# Altium PCB TX_LPF_Add_on.PcbDoc (part 2 of 2)
Units mm, origin at the board's own origin, x right, y up, seen from the top; angles counter-clockwise.
Board outline 187.14 x 77.23 mm, 2 copper layers (Top Layer, Top, Bottom Layer, Bottom); 102 components, 53 nets, 283 pads, 1391 vias.
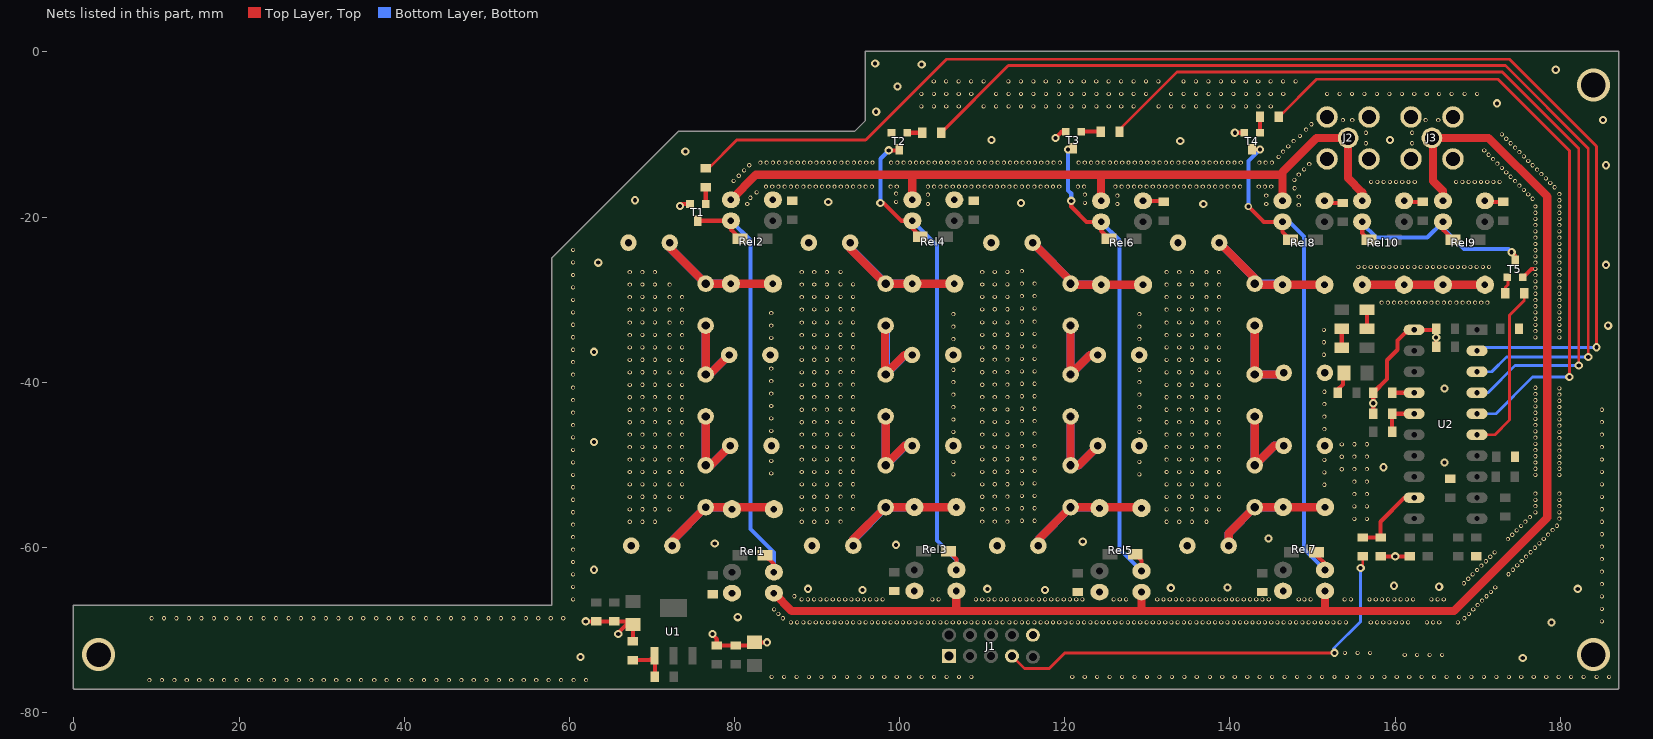
[diagram p2: the nets of this part, all layers, seen from the top]

## Via types
v1: diameter 0.5, hole 0.3, Top Layer, Top to Bottom Layer, Bottom, tented both sides, 1313 vias
v2: diameter 1, hole 0.5, Top Layer, Top to Bottom Layer, Bottom, 73 vias
v3: diameter 4, hole 3, Top Layer, Top to Bottom Layer, Bottom, 3 vias
v4: diameter 0.9, hole 0.5, Top Layer, Top to Bottom Layer, Bottom, 1 vias
v5: diameter 1.27, hole 0.711, Top Layer, Top to Bottom Layer, Bottom, 1 vias

## Nets (pads, with @x,y where several pads share a name; then routed paths per layer and width w, separated by ;. In a path a pad name is that pad's centre, name@x,y a point inside that pad or via, vN(x,y) a via of type N, cw(c..) or ccw(c..) an arc to the next point about the centre after c; other vN are vias at no path point) (continued)
GND: C1.2 C2.1 C3.1 C4.1 C5.1 C6.1 C7.2 C8.1 C9.1 C10.1 C11.1 C12.1 C13.2 C14.1 C15.1 C16.1 C17.1 C18.1 C19.1 C20.1 C21.1 C22.1 C23.1 C24.1 C25.2 C26.1 C27.1 C28.1 C29.1 C30.1 C31.1 C32.1 C33.1 C34.2 C35.1 C36.2 C37.1 J1.1 J1.10 J2.1 J2.2 J2.3 J2.4 J3.1 J3.2 J3.3 J3.4 R5.1 R6.1 R9.1 R10.1 R13.1 R15.2 R17.1 R20.2 Rel1.2 Rel2.2 Rel3.2 Rel4.2 Rel5.2 Rel6.2 Rel7.2 Rel8.2 Rel9.2 Rel10.2 T1.2 T2.2 T3.2 T4.2 T5.2 U2.20 | length 57.2
  Top Layer, Top w0.5: v2(61.976,-68.961) C22.1@63.246,-68.961 C23.1@65.405,-68.961 67.307,-68.961 C24.1@67.691,-69.345 ; v2(65.913,-70.485) 65.786,-70.485 66.926,-69.345 C24.1@67.691,-69.345 ; R15.2@67.691,-71.374 C24.1@67.691,-69.345 ; v2(73.406,-18.669) 73.66,-18.415 T1.2@74.609,-18.415 ; v2(77.343,-70.485) 77.343,-70.612 77.851,-71.12 C20.1@77.851,-71.882 C21.1@80.137,-71.882 82.042,-71.882 C19.1@82.423,-71.501 v2(83.947,-71.501) ; v2(118.872,-10.414) 119.634,-9.652 T3.2@120.091,-9.652 ; Rel6.2@129.473,-18.034 131.826,-18.034 C14.1@131.953,-18.161 ; v2(140.589,-9.779) T4.2@141.732,-9.779 ; Rel8.2@151.444,-18.034 151.698,-18.288 C26.1@153.67,-18.288 ; R20.2@153.035,-41.275 153.035,-40.894 153.67,-40.259 153.67,-38.986 C33.1@153.794,-38.862 ; C37.1@157.353,-43.815 v2(157.353,-42.545) R17.1@157.353,-41.275 159.004,-39.624 159.004,-37.338 160.274,-36.068 160.274,-34.925 161.544,-33.655 U2.20@162.306,-33.655 164.846,-33.655 C34.2@164.973,-33.528 v2(164.973,-34.568) C31.1@164.973,-35.687 ; R13.1@158.242,-61.087 v2(160.02,-61.087) R10.1@161.798,-61.087 ; Rel10.2@161.096,-18.034 161.223,-18.161 C36.2@163.322,-18.161 ; Rel9.2@170.875,-18.034 171.002,-18.161 C35.1@173.101,-18.161 ; T5.2@175.465,-27.305 176.496,-26.274 176.726,-26.274
  other v1: 9.144,-76.073 10.652,-76.073 12.16,-76.073 13.668,-76.073 15.176,-76.073 16.684,-76.073 18.192,-76.073 19.7,-76.073 21.208,-76.073 22.716,-76.073 24.224,-76.073 25.732,-76.073 27.24,-76.073 28.748,-76.073 30.256,-76.073 31.764,-76.073 33.272,-76.073 34.78,-76.073 36.361,-76.073 37.869,-76.073 39.377,-76.073 40.885,-76.073 42.393,-76.073 43.901,-76.073 45.409,-76.073 46.917,-76.073 48.425,-76.073 49.95,-76.073 51.458,-76.073 52.966,-76.073 54.474,-76.073 55.982,-76.073 57.49,-76.073 58.998,-76.073 60.506,-76.073 62.014,-76.073 84.493,-75.692 86.001,-75.692 87.509,-75.692 89.017,-75.692 90.525,-75.692 92.033,-75.692 93.614,-75.692 95.122,-75.692 96.63,-75.692 98.138,-75.692 99.646,-75.692 101.154,-75.692 102.662,-75.692 104.17,-75.692 105.678,-75.692 107.186,-75.692 108.694,-75.692 120.904,-75.692 122.412,-75.692 123.92,-75.692 125.428,-75.692 126.936,-75.692 128.444,-75.692 129.952,-75.692 131.46,-75.692 132.968,-75.692 134.476,-75.692 135.984,-75.692 137.565,-75.692 139.073,-75.692 140.581,-75.692 142.089,-75.692 143.597,-75.692 145.105,-75.692 146.613,-75.692 148.121,-75.692 149.629,-75.692 151.154,-75.692 152.662,-75.692 154.17,-75.692 155.678,-75.692 157.186,-75.692 158.694,-75.692 160.202,-75.692 161.71,-75.692 163.218,-75.692 164.726,-75.692 166.234,-75.692 167.742,-75.692 169.25,-75.692 170.758,-75.692 172.266,-75.692 173.774,-75.692 175.282,-75.692 176.79,-75.692 178.298,-75.692 179.806,-75.692 181.314,-75.692 182.822,-75.692 184.403,-75.692 185.911,-75.692 161.163,-73.025 162.671,-73.025 164.179,-73.025 165.687,-73.025 153.924,-72.771 155.448,-72.771 156.972,-72.771 86.828,-69.088 87.582,-69.088 88.336,-69.088 89.09,-69.088 89.844,-69.088 90.598,-69.088 91.352,-69.088 92.106,-69.088 92.86,-69.088 93.614,-69.088 94.368,-69.088 95.122,-69.088 95.876,-69.088 96.63,-69.088 97.384,-69.088 98.138,-69.088 98.892,-69.088 99.646,-69.088 100.4,-69.088 101.154,-69.088 101.908,-69.088 102.662,-69.088 103.416,-69.088 104.17,-69.088 104.924,-69.088 105.678,-69.088 106.432,-69.088 107.186,-69.088 107.94,-69.088 108.694,-69.088 109.448,-69.088 110.202,-69.088 110.956,-69.088 111.71,-69.088 112.464,-69.088 113.291,-69.088 114.045,-69.088 114.799,-69.088 115.553,-69.088 116.307,-69.088 117.061,-69.088 117.815,-69.088 118.569,-69.088 119.323,-69.088 120.077,-69.088 120.831,-69.088 121.585,-69.088 122.339,-69.088 123.093,-69.088 123.847,-69.088 124.601,-69.088 125.355,-69.088 126.109,-69.088 126.88,-69.088 127.634,-69.088 128.388,-69.088 129.142,-69.088 129.896,-69.088 130.65,-69.088 131.404,-69.088 132.158,-69.088 132.912,-69.088 133.666,-69.088 134.42,-69.088 135.174,-69.088 135.928,-69.088 136.682,-69.088 137.436,-69.088 138.19,-69.088 138.944,-69.088 139.698,-69.088 140.469,-69.088 141.223,-69.088 141.977,-69.088 142.731,-69.088 143.485,-69.088 144.239,-69.088 144.993,-69.088 145.747,-69.088 146.501,-69.088 147.255,-69.088 148.009,-69.088 148.763,-69.088 149.517,-69.088 150.271,-69.088 151.025,-69.088 151.779,-69.088 152.533,-69.088 153.287,-69.088 154.041,-69.088 157.057,-69.088 157.811,-69.088 158.565,-69.088 159.319,-69.088 160.073,-69.088 160.827,-69.088 161.581,-69.088 163.843,-69.088 164.597,-69.088 165.351,-69.088 167.613,-69.088 185.039,-68.961 9.398,-68.58 10.906,-68.58 12.414,-68.58 13.922,-68.58 15.43,-68.58 16.938,-68.58 18.446,-68.58 19.954,-68.58 21.462,-68.58 22.97,-68.58 24.478,-68.58 25.986,-68.58 27.494,-68.58 29.002,-68.58 30.51,-68.58 32.018,-68.58 33.526,-68.58 35.034,-68.58 36.615,-68.58 38.123,-68.58 39.631,-68.58 41.139,-68.58 42.647,-68.58 44.155,-68.58 45.663,-68.58 47.171,-68.58 48.679,-68.58 50.204,-68.58 51.712,-68.58 53.22,-68.58 54.728,-68.58 56.236,-68.58 57.744,-68.58 59.252,-68.58 85.852,-68.58 168.402,-68.58 85.319,-68.047 168.935,-68.047 84.786,-67.514 169.468,-67.514 185.039,-67.453 170.001,-66.981 170.535,-66.447 60.452,-66.294 88.13,-66.294 88.884,-66.294 89.638,-66.294 90.392,-66.294 91.146,-66.294 91.9,-66.294 92.654,-66.294 93.408,-66.294 94.162,-66.294 94.916,-66.294 95.67,-66.294 96.424,-66.294 97.178,-66.294 97.932,-66.294 103.964,-66.294 104.718,-66.294 109.242,-66.294 109.996,-66.294 110.75,-66.294 111.504,-66.294 112.258,-66.294 113.012,-66.294 113.839,-66.294 114.593,-66.294 115.347,-66.294 116.101,-66.294 116.855,-66.294 117.609,-66.294 118.363,-66.294 119.117,-66.294 119.871,-66.294 120.625,-66.294 121.379,-66.294 122.133,-66.294 125.903,-66.294 126.657,-66.294 127.428,-66.294 131.198,-66.294 131.952,-66.294 132.706,-66.294 133.46,-66.294 134.214,-66.294 134.968,-66.294 135.722,-66.294 136.476,-66.294 137.23,-66.294 137.984,-66.294 138.738,-66.294 139.492,-66.294 140.246,-66.294 140.923,-66.294 141.677,-66.294 142.431,-66.294 143.185,-66.294 143.939,-66.294 144.693,-66.294 148.336,-66.294 149.013,-66.294 149.767,-66.294 153.884,-66.294 154.638,-66.294 156.9,-66.294 157.654,-66.294 158.408,-66.294 159.162,-66.294 159.916,-66.294 160.67,-66.294 161.424,-66.294 162.178,-66.294 164.391,-66.294 165.145,-66.294 165.899,-66.294 185.039,-65.945 87.249,-65.913 171.068,-65.914 171.601,-65.381 172.134,-64.848 60.452,-64.786 185.039,-64.437 168.325,-64.339 168.858,-63.806 60.452,-63.278 169.392,-63.272 173.734,-63.248 185.039,-62.929 169.925,-62.739 174.267,-62.715 170.458,-62.206 174.8,-62.182 60.452,-61.77 170.991,-61.673 175.333,-61.649 185.039,-61.421 171.524,-61.14 175.866,-61.116 172.057,-60.607 176.399,-60.583 60.452,-60.262 176.933,-60.049 185.039,-59.913 177.466,-59.516 173.657,-59.007 177.999,-58.983 60.452,-58.754 174.19,-58.474 178.532,-58.45 185.039,-58.405 174.723,-57.941 179.065,-57.917 175.256,-57.408 179.598,-57.384 60.452,-57.246 67.31,-56.903 88.138,-56.903 132.334,-56.903 137.16,-56.903 68.834,-56.888 70.358,-56.888 89.662,-56.888 91.186,-56.888 109.996,-56.887 133.858,-56.888 135.382,-56.888 175.79,-56.874 185.039,-56.897 92.837,-56.872 111.52,-56.872 113.044,-56.872 114.808,-56.776 116.332,-56.776 155.065,-56.555 156.589,-56.555 179.9,-56.507 176.323,-56.341 60.452,-55.738 177,-55.753 179.9,-55.753 67.31,-55.395 68.834,-55.38 70.358,-55.38 72.136,-55.395 88.138,-55.395 89.662,-55.38 91.186,-55.38 109.996,-55.379 132.334,-55.395 133.858,-55.38 135.382,-55.38 137.16,-55.395 138.684,-55.395 185.039,-55.389 92.837,-55.364 94.361,-55.364 111.52,-55.364 113.044,-55.364 114.808,-55.268 116.332,-55.268 155.065,-55.047 156.589,-55.047 177,-54.999 179.9,-54.999 177,-54.245 179.9,-54.245 60.452,-54.23 67.31,-53.887 72.136,-53.887 73.66,-53.887 88.138,-53.887 132.334,-53.887 137.16,-53.887 138.684,-53.887 185.039,-53.881 68.834,-53.872 70.358,-53.872 89.662,-53.872 91.186,-53.872 92.837,-53.856 94.361,-53.856 109.996,-53.871 111.52,-53.856 113.044,-53.856 133.858,-53.872 135.382,-53.872 114.808,-53.76 116.332,-53.76 155.065,-53.539 156.589,-53.539 177,-53.491 179.9,-53.491 60.452,-52.722 151.444,-52.419 67.31,-52.379 72.136,-52.379 73.66,-52.379 88.138,-52.379 132.334,-52.379 137.16,-52.379 138.684,-52.379 68.834,-52.364 70.358,-52.364 89.662,-52.364 91.186,-52.364 109.996,-52.363 133.858,-52.364 135.382,-52.364 185.039,-52.373 92.837,-52.348 94.361,-52.348 111.52,-52.348 113.044,-52.348 114.808,-52.252 116.332,-52.252 155.065,-52.031 156.589,-52.031 60.452,-51.214 177,-51.229 179.9,-51.229 106.512,-51.165 129.032,-51.165 84.455,-51.038 151.444,-50.911 67.31,-50.871 68.834,-50.856 70.358,-50.856 72.136,-50.871 73.66,-50.871 88.138,-50.871 89.662,-50.856 91.186,-50.856 109.996,-50.855 132.334,-50.871 133.858,-50.856 135.382,-50.856 137.16,-50.871 138.684,-50.871 185.039,-50.865 92.837,-50.84 94.361,-50.84 111.52,-50.84 113.044,-50.84 114.808,-50.744 116.332,-50.744 153.541,-50.538 155.065,-50.523 156.589,-50.523 177,-50.475 179.9,-50.475 179.9,-49.784 177,-49.721 60.452,-49.706 106.512,-49.657 129.032,-49.657 84.455,-49.53 151.444,-49.403 67.31,-49.363 72.136,-49.363 73.66,-49.363 88.138,-49.363 132.334,-49.363 137.16,-49.363 138.684,-49.363 185.039,-49.357 68.834,-49.348 70.358,-49.348 89.662,-49.348 91.186,-49.348 92.837,-49.332 94.361,-49.332 109.996,-49.347 111.52,-49.332 113.044,-49.332 133.858,-49.348 135.382,-49.348 114.808,-49.236 116.332,-49.236 153.541,-49.03 179.9,-49.03 155.065,-49.015 156.589,-49.015 177,-48.967 179.9,-48.276 177,-48.213 60.452,-48.198 67.31,-47.855 68.834,-47.84 70.358,-47.84 72.136,-47.855 73.66,-47.855 88.138,-47.855 89.662,-47.84 91.186,-47.84 109.996,-47.839 132.334,-47.855 133.858,-47.84 135.382,-47.84 137.16,-47.855 138.684,-47.855 185.039,-47.849 92.837,-47.824 94.361,-47.824 111.52,-47.824 113.044,-47.824 114.808,-47.728 116.332,-47.728 153.541,-47.522 155.065,-47.507 156.589,-47.507 179.9,-47.522 177,-47.459 179.9,-46.768 60.452,-46.69 177,-46.705 67.31,-46.347 68.834,-46.332 70.358,-46.332 72.136,-46.347 73.66,-46.347 88.138,-46.347 89.662,-46.332 91.186,-46.332 132.334,-46.347 133.858,-46.332 135.382,-46.332 137.16,-46.347 138.684,-46.347 185.039,-46.341 92.837,-46.316 94.361,-46.316 109.996,-46.331 111.52,-46.316 113.044,-46.316 114.808,-46.22 116.332,-46.22 106.512,-46.021 129.032,-46.021 179.9,-46.014 177,-45.951 84.455,-45.894 151.444,-45.672 179.9,-45.26 177,-45.197 60.452,-45.182 67.31,-44.839 72.136,-44.839 73.66,-44.839 88.138,-44.839 132.334,-44.839 137.16,-44.839 138.684,-44.839 185.039,-44.833 68.834,-44.824 70.358,-44.824 89.662,-44.824 91.186,-44.824 92.837,-44.808 94.361,-44.808 109.996,-44.823 111.52,-44.808 113.044,-44.808 133.858,-44.824 135.382,-44.824 114.808,-44.712 116.332,-44.712 106.512,-44.513 129.032,-44.513 179.9,-44.506 177,-44.443 84.455,-44.386 151.444,-44.164 179.9,-43.752 60.452,-43.674 177,-43.689 67.31,-43.331 68.834,-43.316 70.358,-43.316 72.136,-43.331 73.66,-43.331 88.138,-43.331 89.662,-43.316 91.186,-43.316 109.996,-43.315 132.334,-43.331 133.858,-43.316 135.382,-43.316 137.16,-43.331 138.684,-43.331 185.039,-43.325 92.837,-43.3 94.361,-43.3 111.52,-43.3 113.044,-43.3 114.808,-43.204 116.332,-43.204 106.512,-43.005 129.032,-43.005 179.9,-42.998 177,-42.935 84.455,-42.878 151.444,-42.656 179.9,-42.244 60.452,-42.166 177,-42.181 67.31,-41.823 72.136,-41.823 73.66,-41.823 88.138,-41.823 132.334,-41.823 137.16,-41.823 138.684,-41.823 68.834,-41.808 70.358,-41.808 89.662,-41.808 91.186,-41.808 92.837,-41.792 94.361,-41.792 109.996,-41.807 111.52,-41.792 113.044,-41.792 133.858,-41.808 135.382,-41.808 114.808,-41.696 116.332,-41.696 106.512,-41.497 129.032,-41.497 179.9,-41.49 177,-41.427 84.455,-41.37 151.444,-41.148 179.9,-40.736 177,-40.673 60.452,-40.658 67.31,-40.315 72.136,-40.315 73.66,-40.315 88.138,-40.315 132.334,-40.315 137.16,-40.315 138.684,-40.315 68.834,-40.3 70.358,-40.3 89.662,-40.3 91.186,-40.3 109.996,-40.299 133.858,-40.3 135.382,-40.3 92.837,-40.284 94.361,-40.284 111.52,-40.284 113.044,-40.284 114.808,-40.188 116.332,-40.188 106.512,-39.989 129.032,-39.989 84.455,-39.862 60.452,-39.077 67.31,-38.807 68.834,-38.792 70.358,-38.792 72.136,-38.807 73.66,-38.807 88.138,-38.807 89.662,-38.792 91.186,-38.792 109.996,-38.791 132.334,-38.807 133.858,-38.792 135.382,-38.792 137.16,-38.807 138.684,-38.807 92.837,-38.776 94.361,-38.776 111.52,-38.776 113.044,-38.776 114.808,-38.68 116.332,-38.68 106.512,-38.481 129.032,-38.481 84.455,-38.354 60.452,-37.569 67.31,-37.299 72.136,-37.299 73.66,-37.299 88.138,-37.299 132.334,-37.299 137.16,-37.299 138.684,-37.299 68.834,-37.284 70.358,-37.284 89.662,-37.284 91.186,-37.284 92.837,-37.268 94.361,-37.268 109.996,-37.283 111.52,-37.268 113.044,-37.268 133.858,-37.284 135.382,-37.284 114.808,-37.172 116.332,-37.172 151.384,-36.671 60.452,-36.061 67.31,-35.791 72.136,-35.791 73.66,-35.791 88.138,-35.791 132.334,-35.791 137.16,-35.791 138.684,-35.791 68.834,-35.776 70.358,-35.776 89.662,-35.776 91.186,-35.776 109.996,-35.775 133.858,-35.776 135.382,-35.776 92.837,-35.76 94.361,-35.76 111.52,-35.76 113.044,-35.76 114.808,-35.664 116.332,-35.664 151.384,-35.163 106.512,-34.766 129.032,-34.766 84.455,-34.639 60.452,-34.553 177,-34.568 179.9,-34.568 67.31,-34.283 68.834,-34.268 70.358,-34.268 72.136,-34.283 73.66,-34.283 88.138,-34.283 89.662,-34.268 91.186,-34.268 109.996,-34.267 132.334,-34.283 133.858,-34.268 135.382,-34.268 137.16,-34.283 138.684,-34.283 92.837,-34.252 94.361,-34.252 111.52,-34.252 113.044,-34.252 114.808,-34.156 116.332,-34.156 177,-33.814 179.9,-33.814 151.384,-33.655 106.512,-33.258 129.032,-33.258 84.455,-33.131 177,-33.06 179.9,-33.06 60.452,-33.045 67.31,-32.775 72.136,-32.775 73.66,-32.775 88.138,-32.775 132.334,-32.775 137.16,-32.775 138.684,-32.775 68.834,-32.76 70.358,-32.76 89.662,-32.76 91.186,-32.76 92.837,-32.744 94.361,-32.744 109.996,-32.759 111.52,-32.744 113.044,-32.744 133.858,-32.76 135.382,-32.76 114.808,-32.648 116.332,-32.648 177,-32.306 179.9,-32.306 106.512,-31.75 129.032,-31.75 84.455,-31.623 177,-31.552 179.9,-31.552 60.452,-31.537 67.31,-31.194 72.136,-31.194 73.66,-31.194 88.138,-31.194 132.334,-31.194 137.16,-31.194 138.684,-31.194 68.834,-31.179 70.358,-31.179 89.662,-31.179 91.186,-31.179 109.996,-31.178 133.858,-31.179 135.382,-31.179 92.837,-31.163 94.361,-31.163 111.52,-31.163 113.044,-31.163 114.808,-31.067 116.332,-31.067 177,-30.798 179.9,-30.798 158.369,-30.353 159.123,-30.353 159.877,-30.353 160.631,-30.353 161.385,-30.353 162.139,-30.353 162.893,-30.353 163.647,-30.353 164.401,-30.353 165.155,-30.353 165.909,-30.353 166.663,-30.353 167.417,-30.353 168.171,-30.353 168.925,-30.353 169.679,-30.353 170.433,-30.353 171.187,-30.353 60.452,-30.029 177,-30.044 179.9,-30.044 67.31,-29.686 68.834,-29.671 70.358,-29.671 72.136,-29.686 73.66,-29.686 88.138,-29.686 89.662,-29.671 91.186,-29.671 109.996,-29.67 132.334,-29.686 133.858,-29.671 135.382,-29.671 137.16,-29.686 138.684,-29.686 92.837,-29.655 94.361,-29.655 111.52,-29.655 113.044,-29.655 114.808,-29.559 116.332,-29.559 177,-29.29 179.9,-29.29 177,-28.536 179.9,-28.536 60.452,-28.521 67.31,-28.178 72.136,-28.178 88.138,-28.178 132.334,-28.178 137.16,-28.178 138.684,-28.178 68.834,-28.163 70.358,-28.163 89.662,-28.163 91.186,-28.163 92.837,-28.147 94.361,-28.147 109.996,-28.162 111.52,-28.147 113.044,-28.147 133.858,-28.163 135.382,-28.163 114.808,-28.051 116.332,-28.051 177,-27.782 179.9,-27.782 177,-27.028 179.9,-27.028 60.452,-27.013 67.31,-26.67 68.834,-26.655 70.358,-26.655 88.138,-26.67 89.662,-26.655 91.186,-26.655 109.996,-26.654 132.334,-26.67 133.858,-26.655 135.382,-26.655 137.16,-26.67 138.684,-26.67 92.837,-26.639 111.52,-26.639 113.044,-26.639 114.808,-26.543 177,-26.274 179.9,-26.274 155.549,-26.035 156.303,-26.035 157.057,-26.035 157.811,-26.035 158.565,-26.035 159.319,-26.035 160.073,-26.035 160.827,-26.035 161.581,-26.035 162.335,-26.035 163.089,-26.035 163.843,-26.035 164.597,-26.035 165.351,-26.035 166.105,-26.035 166.859,-26.035 167.613,-26.035 168.367,-26.035 169.121,-26.035 169.875,-26.035 170.629,-26.035 171.383,-26.035 177,-25.52 179.9,-25.52 60.452,-25.488 177,-24.766 179.9,-24.766 177,-24.012 179.9,-24.012 60.452,-23.98 177,-23.258 179.9,-23.241 177,-22.487 179.9,-22.487 177,-21.733 179.9,-21.733 177,-20.979 179.9,-20.979 177,-20.225 179.9,-20.225 177,-19.471 179.9,-19.471 177,-18.717 179.9,-18.717 148.336,-18.542 81.534,-18.415 103.416,-18.415 126.365,-18.415 144.399,-18.415 122.428,-18.288 99.568,-18.161 179.9,-17.963 176.657,-17.78 81.915,-17.653 148.336,-17.526 126.365,-17.399 144.399,-17.399 103.416,-17.272 122.428,-17.272 176.124,-17.247 179.9,-17.209 99.568,-17.145 82.677,-17.018 175.591,-16.714 147.828,-16.51 179.324,-16.383 83.812,-16.3 84.566,-16.3 85.32,-16.3 86.074,-16.3 86.828,-16.3 87.582,-16.3 88.336,-16.3 89.09,-16.3 89.844,-16.3 90.598,-16.3 91.352,-16.3 92.106,-16.3 92.86,-16.3 93.614,-16.3 94.368,-16.3 95.122,-16.3 95.876,-16.3 96.63,-16.3 98.892,-16.3 99.646,-16.3 103.416,-16.3 104.17,-16.3 104.924,-16.3 105.678,-16.3 106.432,-16.3 107.186,-16.3 107.94,-16.3 108.694,-16.3 109.521,-16.3 110.275,-16.3 111.029,-16.3 111.783,-16.3 112.537,-16.3 113.291,-16.3 114.045,-16.3 114.799,-16.3 115.553,-16.3 116.307,-16.3 117.061,-16.3 117.815,-16.3 118.569,-16.3 119.323,-16.3 121.585,-16.3 122.339,-16.3 126.126,-16.3 126.88,-16.3 127.634,-16.3 128.388,-16.3 129.142,-16.3 129.896,-16.3 130.65,-16.3 131.404,-16.3 132.158,-16.3 132.912,-16.3 133.666,-16.3 134.42,-16.3 135.174,-16.3 135.928,-16.3 136.699,-16.3 137.453,-16.3 138.207,-16.3 138.961,-16.3 139.715,-16.3 140.469,-16.3 141.223,-16.3 143.485,-16.3 144.239,-16.3 144.993,-16.3 175.058,-16.181 178.791,-15.85 157.099,-15.748 157.853,-15.748 158.607,-15.748 159.361,-15.748 160.115,-15.748 160.869,-15.748 161.623,-15.748 162.377,-15.748 167.386,-15.748 168.14,-15.748 168.894,-15.748 169.648,-15.748 170.402,-15.748 171.156,-15.748 171.91,-15.748 172.664,-15.748 174.524,-15.647 79.883,-15.621 147.801,-15.494 178.258,-15.317 173.991,-15.114 80.518,-14.986 148.336,-14.859 177.725,-14.784 173.458,-14.581 81.153,-14.351 177.191,-14.25 148.971,-14.224 172.925,-14.048 81.788,-13.716 176.658,-13.717 149.606,-13.589 172.392,-13.515 83.138,-13.4 83.892,-13.4 84.646,-13.4 85.4,-13.4 86.154,-13.4 86.908,-13.4 87.662,-13.4 88.416,-13.4 89.17,-13.4 89.924,-13.4 90.678,-13.4 91.432,-13.4 92.186,-13.4 92.94,-13.4 93.694,-13.4 94.448,-13.4 95.202,-13.4 95.956,-13.4 96.71,-13.4 98.972,-13.4 99.726,-13.4 100.48,-13.4 101.234,-13.4 101.988,-13.4 102.742,-13.4 103.496,-13.4 104.25,-13.4 105.004,-13.4 105.758,-13.4 106.512,-13.4 107.266,-13.4 108.02,-13.4 108.774,-13.4 109.601,-13.4 110.355,-13.4 111.109,-13.4 111.863,-13.4 112.617,-13.4 113.371,-13.4 114.125,-13.4 114.879,-13.4 115.633,-13.4 116.387,-13.4 117.141,-13.4 117.895,-13.4 118.649,-13.4 119.403,-13.4 121.665,-13.4 122.419,-13.4 123.19,-13.4 123.944,-13.4 124.698,-13.4 125.452,-13.4 126.206,-13.4 126.96,-13.4 127.714,-13.4 128.468,-13.4 129.222,-13.4 129.976,-13.4 130.73,-13.4 131.484,-13.4 132.238,-13.4 132.992,-13.4 133.746,-13.4 134.5,-13.4 135.254,-13.4 136.008,-13.4 136.779,-13.4 137.533,-13.4 138.287,-13.4 139.041,-13.4 139.795,-13.4 140.549,-13.4 141.303,-13.4 143.565,-13.4 144.319,-13.4 145.073,-13.4 176.125,-13.184 171.859,-12.982 145.896,-12.7 175.592,-12.651 171.325,-12.448 175.059,-12.118 146.431,-12.065 170.792,-11.915 174.526,-11.585 147.066,-11.43 173.992,-11.051 156.464,-11.049 162.052,-11.049 147.701,-10.795 173.459,-10.518 148.463,-10.16 172.926,-9.985 156.464,-9.779 162.052,-9.779 149.225,-9.398 149.86,-8.763 153.67,-8.255 154.813,-8.255 163.703,-8.255 165.227,-8.255 102.631,-6.604 104.139,-6.604 105.647,-6.604 107.155,-6.604 110.171,-6.604 111.679,-6.604 113.187,-6.604 114.695,-6.604 116.203,-6.604 117.711,-6.604 119.292,-6.604 120.8,-6.604 122.308,-6.604 123.816,-6.604 125.324,-6.604 126.832,-6.604 128.34,-6.604 131.356,-6.604 132.881,-6.604 134.389,-6.604 135.897,-6.604 137.405,-6.604 138.913,-6.604 140.421,-6.604 141.929,-6.604 143.437,-6.604 144.945,-6.604 102.631,-5.08 104.139,-5.08 105.647,-5.08 107.155,-5.08 108.663,-5.08 111.679,-5.08 113.187,-5.08 114.695,-5.08 116.203,-5.08 117.711,-5.08 119.292,-5.08 120.8,-5.08 122.308,-5.08 123.816,-5.08 125.324,-5.08 126.832,-5.08 128.34,-5.08 129.848,-5.08 132.881,-5.08 134.389,-5.08 135.897,-5.08 137.405,-5.08 138.913,-5.08 140.421,-5.08 141.929,-5.08 143.437,-5.08 144.945,-5.08 146.453,-5.08 151.765,-5.08 153.273,-5.08 154.781,-5.08 156.289,-5.08 157.797,-5.08 159.305,-5.08 160.813,-5.08 162.321,-5.08 163.829,-5.08 165.337,-5.08 166.845,-5.08 168.426,-5.08 169.934,-5.08 104.124,-3.556 105.632,-3.556 107.14,-3.556 108.648,-3.556 110.156,-3.556 113.172,-3.556 114.68,-3.556 116.188,-3.556 117.696,-3.556 119.277,-3.556 120.785,-3.556 122.293,-3.556 123.801,-3.556 125.309,-3.556 126.817,-3.556 128.325,-3.556 129.833,-3.556 131.341,-3.556 134.374,-3.556 135.882,-3.556 137.39,-3.556 138.898,-3.556 140.406,-3.556 141.914,-3.556 143.422,-3.556 144.93,-3.556 146.438,-3.556 147.946,-3.556
  other v2: 175.465,-73.406 61.341,-73.285 178.943,-69.088 80.391,-68.453 95.504,-65.151 117.602,-65.151 88.9,-65.024 110.617,-65.024 182.118,-65.024 132.842,-64.897 139.7,-64.848 165.337,-64.77 159.877,-64.643 62.992,-62.715 99.568,-59.69 77.597,-59.516 122.174,-59.309 144.653,-58.928 158.607,-50.292 165.989,-49.706 62.992,-47.244 165.989,-40.767 62.992,-36.322 185.801,-33.147 185.547,-25.781 63.5,-25.52 136.779,-18.415 114.681,-18.288 91.352,-18.161 67.945,-17.963 185.547,-13.716 74.041,-12.065 133.985,-10.795 111.125,-10.668 159.385,-10.668 185.166,-8.255 97.155,-7.239 172.339,-6.223 99.726,-4.191 179.451,-2.159 102.662,-1.524 97.028,-1.397
  other v3: 3,-73 184,-73 184,-4
NetC3_2: C3.2 L1.1 Rel1.1 | length 24.3
  Top Layer, Top w1: C3.2@72.477,-59.8 72.477,-59.163 L1.1@76.5,-55.14 84.537,-55.14 Rel1.1@84.769,-55.372
  Bottom Layer, Bottom w1: C3.2@72.477,-59.8 72.477,-59.163 L1.1@76.5,-55.14 79.457,-55.14 Rel1.1@79.689,-55.372
NetC4_2: C4.2 L1.2 L2.1 | length 19.7
  Top Layer, Top w1: L2.1@76.5,-44.14 L1.2@76.5,-50.06 77.115,-50.06 C4.2@79.475,-47.7
  Bottom Layer, Bottom w1: L2.1@76.5,-44.14 L1.2@76.5,-50.06 77.115,-50.06 C4.2@79.475,-47.7
NetC5_2: C5.2 L2.2 L3.1 | length 19.5
  Top Layer, Top w1: L3.1@76.5,-33.14 L2.2@76.5,-39.06 76.988,-39.06 C5.2@79.348,-36.7
  Bottom Layer, Bottom w1: L3.1@76.5,-33.14 L2.2@76.5,-39.06 76.988,-39.06 C5.2@79.348,-36.7
NetC6_2: C6.2 L3.2 Rel2.1 | length 24.7
  Top Layer, Top w1: C6.2@72.156,-23.1 72.156,-23.716 L3.2@76.5,-28.06 84.635,-28.06 Rel2.1@84.642,-28.067
  Bottom Layer, Bottom w1: C6.2@72.156,-23.1 72.156,-23.716 L3.2@76.5,-28.06 79.241,-28.06 79.248,-28.067 Rel2.1@79.562,-28.067
NetC9_2: C9.2 L4.1 Rel3.1 | length 24.7
  Top Layer, Top w1: C9.2@94.381,-59.8 94.381,-59.013 98.254,-55.14 L4.1@98.3,-55.14 106.845,-55.14 Rel3.1@106.867,-55.118
  Bottom Layer, Bottom w1: C9.2@94.381,-59.8 94.381,-59.059 L4.1@98.3,-55.14 101.765,-55.14 Rel3.1@101.787,-55.118
NetC10_2: C10.2 L4.2 L5.1 | length 20.2
  Top Layer, Top w1: L5.1@98.231,-44.14 L5.1@98.254,-44.163 ; L4.2@98.3,-50.06 L4.2@98.3,-50.014 ; L5.1@98.3,-44.14 L4.2@98.3,-50.014 ; C10.2@101.5,-47.7 100.614,-47.7 L4.2@98.3,-50.014
  Bottom Layer, Bottom w1: L5.1@98.3,-44.14 L4.2@98.3,-50.06 100.66,-47.7 C10.2@101.5,-47.7
NetC11_2: C11.2 L5.2 L6.1 | length 20.3
  Top Layer, Top w1: L6.1@98.231,-33.14 98.231,-39.06 100.591,-36.7 C11.2@101.5,-36.7
  Bottom Layer, Bottom w1: L6.1@98.3,-33.14 L5.2@98.3,-39.06 100.66,-36.7 C11.2@101.5,-36.7
NetC12_2: C12.2 L6.2 Rel4.1 | length 25.1
  Top Layer, Top w1: C12.2@94,-23.1 94,-23.829 98.231,-28.06 L6.2@98.3,-28.06 106.606,-28.06 Rel4.1@106.613,-28.067
  Bottom Layer, Bottom w1: C12.2@94,-23.1 94,-23.769 98.298,-28.067 Rel4.1@101.533,-28.067
NetC15_2: C15.2 L7.1 Rel5.1 | length 24.7
  Top Layer, Top w1: C15.2@116.8,-59.8 116.8,-59.04 L7.1@120.7,-55.14 129.181,-55.14 Rel5.1@129.286,-55.245
  Bottom Layer, Bottom w1: C15.2@116.8,-59.8 116.8,-59.04 L7.1@120.7,-55.14 124.101,-55.14 Rel5.1@124.206,-55.245
NetC16_2: C16.2 L7.2 L8.1 | length 20.4
  Top Layer, Top w1: L8.1@120.7,-44.14 L7.2@120.7,-50.06 121.64,-50.06 C16.2@124,-47.7
  Bottom Layer, Bottom w1: L8.1@120.7,-44.14 L7.2@120.7,-50.06 121.64,-50.06 C16.2@124,-47.7
NetC17_2: C17.2 L8.2 L9.1 | length 20.4
  Top Layer, Top w1: L9.1@120.7,-33.14 L8.2@120.7,-39.06 123.06,-36.7 C17.2@124,-36.7
  Bottom Layer, Bottom w1: L9.1@120.7,-33.14 L8.2@120.7,-39.06 123.06,-36.7 C17.2@124,-36.7
NetC18_2: C18.2 L9.2 Rel6.1 | length 25.9
  Top Layer, Top w1: C18.2@116.098,-23.1 121.192,-28.194 Rel6.1@124.393,-28.194 Rel6.1@129.473,-28.194
  Bottom Layer, Bottom w1: C18.2@116.098,-23.1 121.192,-28.194 Rel6.1@124.393,-28.194
NetC27_2: C27.2 L10.1 Rel7.1 | length 23.9
  Top Layer, Top w1: C27.2@139.847,-59.8 139.847,-58.293 L10.1@143,-55.14 151.489,-55.14 Rel7.1@151.511,-55.118
  Bottom Layer, Bottom w1: C27.2@139.847,-59.8 139.847,-58.293 L10.1@143,-55.14 146.409,-55.14 Rel7.1@146.431,-55.118
NetC28_2: C28.2 L10.2 L11.1 | length 20.8
  Top Layer, Top w1: L11.1@143,-44.14 L10.2@143,-50.06 145.36,-47.7 C28.2@146.5,-47.7
  Bottom Layer, Bottom w1: L11.1@143,-44.14 L10.2@143,-50.06 145.36,-47.7 C28.2@146.5,-47.7
NetC29_2: C29.2 L11.2 L12.1 | length 19
  Top Layer, Top w1: L12.1@143,-33.14 L11.2@143,-39.06 146.302,-39.06 C29.2@146.5,-38.862
  Bottom Layer, Bottom w1: L12.1@143,-33.14 L11.2@143,-39.06 146.302,-39.06 C29.2@146.5,-38.862
NetC30_2: C30.2 L12.2 Rel8.1 | length 25.3
  Top Layer, Top w1: C30.2@138.704,-23.1 143,-27.396 L12.2@143,-28.06 ; L12.2@143.062,-28.194 Rel8.1@146.364,-28.194 Rel8.1@151.444,-28.194
  Bottom Layer, Bottom w1: C30.2@138.704,-23.1 143,-27.396 L12.2@143,-28.06 146.23,-28.06 Rel8.1@146.364,-28.194
NetC37_2: C37.2 R18.2 U2.16 | length 4.8
  Top Layer, Top w0.5: R18.2@159.639,-45.974 C37.2@159.639,-43.815 U2.16@162.306,-43.815
NetDsh1_A: Dsh1.A Dsh2.A Rel1.4 Rel2.4 T1.3 | length 53.8
  Top Layer, Top w0.5: T1.3@75.549,-20.447 Rel2.4@79.562,-20.447 79.562,-21.525 Dsh2.A@80.643,-22.606 ; Dsh1.A@83.693,-60.96 84.769,-62.036 Rel1.4@84.769,-62.992
  Bottom Layer, Bottom w0.5: Rel2.4@79.562,-20.447 81.915,-22.8 81.915,-57.785 84.769,-60.639 Rel1.4@84.769,-62.992
NetDsh3_A: Dsh3.A Dsh4.A Rel3.4 Rel4.4 T2.3 | length 62.3
  Top Layer, Top w0.5: v2(97.663,-18.288) 98.044,-18.288 100.203,-20.447 Rel4.4@101.533,-20.447 101.533,-21.398 Dsh4.A@102.487,-22.352 ; v2(98.679,-11.915) 99.845,-11.915 T2.3@99.949,-11.811 ; Dsh3.A@105.92,-60.452 106.867,-61.399 Rel3.4@106.867,-62.738
  Bottom Layer, Bottom w0.5: v2(97.663,-18.288) 97.663,-12.931 v2(98.679,-11.915) ; Rel4.4@101.533,-20.447 104.521,-23.435 104.521,-59.182 106.867,-61.528 Rel3.4@106.867,-62.738
NetDsh5_A: Dsh5.A Dsh6.A Rel5.4 Rel6.4 T3.3 | length 60.6
  Top Layer, Top w0.5: v2(120.777,-18.034) 120.831,-18.034 120.777,-18.088 120.777,-18.717 122.634,-20.574 Rel6.4@124.393,-20.574 124.393,-21.652 Dsh6.A@125.347,-22.606 ; Dsh5.A@128.526,-60.833 129.286,-61.593 Rel5.4@129.286,-62.865
  Bottom Layer, Bottom w0.5: v2(120.396,-11.811) 120.396,-16.764 120.777,-17.145 v2(120.777,-18.034) ; Rel6.4@124.393,-20.574 126.619,-22.8 126.619,-60.198 Rel5.4@129.286,-62.865
NetDsh7_A: Dsh7.A Dsh8.A Rel7.4 Rel8.4 T4.3 | length 63.3
  Top Layer, Top w0.5: v4(142.24,-18.717) 144.097,-20.574 Rel8.4@146.364,-20.574 146.364,-21.779 Dsh8.A@147.318,-22.733 ; T4.3@142.672,-11.811 v2(143.637,-11.811) ; Dsh7.A@150.495,-60.579 150.495,-60.96 151.511,-61.976 Rel7.4@151.511,-62.738
  Bottom Layer, Bottom w0.5: v4(142.24,-18.717) 142.24,-13.208 v2(143.637,-11.811) ; Rel8.4@146.364,-20.574 147.193,-20.574 148.971,-22.352 148.971,-60.198 Rel7.4@151.511,-62.738
NetDsh9_K: Dsh9.K Dsh10.A | length 2.3
  Top Layer, Top w0.5: Dsh10.A@156.591,-33.528 156.593,-33.526 Dsh9.K@156.593,-31.242
NetDsh10_K: Dsh10.K Dsh11.A | length 2.3
  Top Layer, Top w0.5: Dsh10.K@153.541,-33.528 153.541,-35.812 Dsh11.A@153.543,-35.814
NetDsh12_A: Dsh12.A Dsh13.A Rel9.4 Rel10.4 T5.3 | length 28.1
  Top Layer, Top w0.5: Rel10.4@156.016,-20.574 156.016,-21.906 Dsh13.A@156.843,-22.733 ; Rel9.4@165.795,-20.574 165.795,-21.525 Dsh12.A@167.003,-22.733 ; v2(174.117,-24.257) 174.526,-24.666 T5.3@174.526,-25.273
  Bottom Layer, Bottom w0.5: Rel10.4@156.016,-20.574 156.016,-20.761 157.734,-22.479 163.89,-22.479 Rel9.4@165.795,-20.574 165.795,-21.346 168.325,-23.876 173.736,-23.876 v2(174.117,-24.257)
NetJ2_5: J2.5 Rel2.3 Rel4.3 Rel6.3 Rel8.3 Rel10.3 | length 95.8
  Top Layer, Top w1: Rel2.3@79.562,-17.907 82.61,-14.859 101.473,-14.859 ; Rel4.3@101.533,-17.907 101.533,-14.919 101.473,-14.859 ; Rel6.3@124.393,-18.034 124.393,-14.919 124.333,-14.859 ; Rel8.3@146.364,-18.034 146.364,-14.859 ; Rel10.3@156.016,-18.034 156.016,-16.999 154.305,-15.288 J2.5@154.305,-10.414 150.495,-10.414 146.364,-14.545 146.364,-14.859 ; 101.473,-14.859 124.333,-14.859 ; 124.333,-14.859 146.364,-14.859
NetJ3_5: J3.5 Rel1.3 Rel3.3 Rel5.3 Rel7.3 Rel9.3 | length 169.4
  Top Layer, Top w1: Rel1.3@84.769,-65.532 86.928,-67.691 167.132,-67.691 178.435,-56.388 178.435,-17.526 171.323,-10.414 J3.5@164.465,-10.414 164.597,-10.546 164.597,-15.621 165.795,-16.819 Rel9.3@165.795,-18.034 Rel9.3@165.862,-17.967 ; 106.867,-67.331 Rel3.3@106.867,-65.278 ; 129.286,-67.331 Rel5.3@129.286,-65.405 ; 151.511,-67.437 Rel7.3@151.511,-65.278
NetR1_1: R1.1 T1.1 | length 2
  Top Layer, Top w0.5: T1.1@76.514,-18.415 R1.1@76.514,-16.383
NetR2_1: R2.1 T2.1 | length 1.8
  Top Layer, Top w0.5: T2.1@100.914,-9.779 R2.1@102.743,-9.779
NetR12_1: R12.1 T3.1 | length 2.3
  Top Layer, Top w0.5: T3.1@121.996,-9.652 R12.1@124.333,-9.652
NetR14_1: R14.1 R15.1 U1.1 | length 5.4
  Top Layer, Top w0.5: R15.1@67.691,-73.66 69.773,-73.66 U1.1@70.302,-73.131 70.358,-73.187 R14.1@70.358,-75.692
NetR16_1: R16.1 T4.1 | length 1.9
  Top Layer, Top w0.5: T4.1@143.637,-9.779 R16.1@143.637,-7.874
NetR17_2: R17.2 U2.17 | length 2.7
  Top Layer, Top w0.5: R17.2@159.639,-41.275 U2.17@162.306,-41.275
NetR19_1: R19.1 T5.1 | length 2.1
  Top Layer, Top w0.35: R19.1@173.355,-29.21 173.355,-28.496 173.657,-28.194 173.657,-27.402 T5.1@173.56,-27.305
NetRel9_1: Rel9.1 Rel10.1 | length 14.9
  Top Layer, Top w1: Rel10.1@156.016,-28.194 Rel10.1@161.096,-28.194 Rel9.1@165.795,-28.194 Rel9.1@170.875,-28.194
PTT: R11.2 R13.2 U2.12 | length 9.3
  Top Layer, Top w0.5: R11.2@156.083,-58.801 R13.2@158.242,-58.801 158.242,-56.896 161.163,-53.975 U2.12@162.306,-53.975
PTT_OUT: J1.7 R11.1 | length 53.7
  Top Layer, Top w0.35: J1.7@113.598,-73.158 115.116,-74.676 118.11,-74.676 120.015,-72.771 v2(152.654,-72.771) ; v2(155.829,-62.484) 156.083,-62.23 R11.1@156.083,-61.087
  Bottom Layer, Bottom w0.35: v2(152.654,-72.771) 152.654,-72.39 152.527,-72.263 155.829,-68.961 v2(155.829,-62.484)
Range_1: R1.2 U2.2 | length 156.7
  Top Layer, Top w0.35: R1.2@76.514,-14.097 76.835,-14.097 80.264,-10.668 95.885,-10.668 105.664,-0.889 173.863,-0.889 184.404,-11.43 v2(184.404,-35.76)
  Bottom Layer, Bottom w0.35: U2.2@169.926,-36.195 170.495,-36.195 170.876,-35.814 184.35,-35.814 v2(184.404,-35.76)
Range_2: R2.2 U2.3 | length 125.4
  Top Layer, Top w0.35: R2.2@105.029,-9.779 113.157,-1.651 173.355,-1.651 183.388,-11.684 v2(183.388,-36.957)
  Bottom Layer, Bottom w0.35: U2.3@169.926,-38.735 171.704,-38.735 173.482,-36.957 v2(183.388,-36.957)
Range_3: R12.2 U2.4 | length 102.6
  Top Layer, Top w0.35: R12.2@126.619,-9.652 126.619,-9.389 133.595,-2.413 172.974,-2.413 182.245,-11.684 v2(182.245,-37.973)
  Bottom Layer, Bottom w0.35: U2.4@169.926,-41.275 171.237,-41.275 174.539,-37.973 v2(182.245,-37.973)
Range_4: R16.2 U2.5 | length 81.4
  Top Layer, Top w0.35: R16.2@145.923,-8.255 R16.2@146.113,-8.064 ; R16.2@145.923,-7.874 150.495,-3.302 172.466,-3.302 181.102,-11.938 v2(181.102,-39.37)
  Bottom Layer, Bottom w0.35: U2.5@169.926,-43.815 172.208,-43.815 176.653,-39.37 v2(181.102,-39.37)
Range_5: R19.2 U2.6 | length 20.8
  Top Layer, Top w0.35: U2.6@169.926,-46.355 172.085,-46.355 173.863,-44.577 173.863,-31.877 175.641,-30.099 R19.2@175.641,-29.21
pads on no net: J1.4 J1.9 U2.7 U2.13 U2.14 U2.15 U2.18 U2.19
copper on no net:
  other v1: 149.469,-6.604

## Polygon pours and split planes (outlines as drawn)
GND on Bottom Layer, Bottom "Bottom Layer, Bottom-GND" (solid, remove dead copper, pour order 2): 0,-77 187,-77 187,0 95.876,0 95.876,-8.391 94.615,-9.652 73.279,-9.652 57.912,-25.019 57.912,-67.088 0,-67.088
GND on Top Layer, Top "Top Layer, Top-GND" (solid, remove dead copper, pour order 0): 0,-77 187,-77 187,0 95.876,0 95.876,-8.391 94.615,-9.652 73.279,-9.652 57.912,-25.019 57.912,-67.088 0,-67.088

## Keep-outs
Keep-Out Layer, Board:
  lines w0.127: 95.876,0 187,0 187,-77
  lines w0.14: 0,-77.088 186.999,-77.088 ; 0,-77 0,-67.088 57.912,-67.088 57.912,-25.019 73.279,-9.652 94.615,-9.652 95.876,-8.391 95.876,0 ; 96.266,0 187,0 187,-77

## Other copper
Top Layer, Top:
  pour cut-out: 125.804,-31.599 127.074,-30.329 130.072,-30.329 131.198,-29.203 131.198,-27.312 128.627,-24.741 120.71,-24.741 117.051,-21.082 114.532,-21.082 114.532,-24.693 118.946,-29.107 118.946,-54.459 115.136,-58.269 115.136,-60.682 115.898,-61.444 117.676,-61.444 118.438,-60.682 118.438,-59.784 121.223,-56.999 130.63,-56.999 131.011,-56.618 131.011,-54.332 130.122,-53.443 128.598,-53.443 125.804,-50.649
  pour cut-out: 103.347,-31.496 104.617,-30.226 107.157,-30.226 108.173,-29.21 108.173,-26.977 105.834,-24.638 98.552,-24.638 94.893,-20.979 92.075,-20.979 92.075,-24.59 96.489,-29.004 96.489,-54.356 92.679,-58.166 92.679,-60.579 93.441,-61.341 95.219,-61.341 95.981,-60.579 95.981,-59.681 98.766,-56.896 108.173,-56.896 108.554,-56.515 108.554,-54.229 107.665,-53.34 106.141,-53.34 103.347,-50.546
  pour cut-out: 81.503,-31.472 82.773,-30.202 85.313,-30.202 86.329,-29.186 86.329,-26.953 83.99,-24.614 76.938,-24.614 73.279,-20.955 70.231,-20.955 70.231,-24.566 74.645,-28.98 74.645,-54.332 70.835,-58.142 70.835,-60.555 71.597,-61.317 73.375,-61.317 74.137,-60.555 74.137,-59.657 76.922,-56.872 86.329,-56.872 86.71,-56.491 86.71,-54.205 85.821,-53.316 84.297,-53.316 81.503,-50.522
  pour cut-out: 148.305,-31.496 149.575,-30.226 152.115,-30.226 153.131,-29.21 153.131,-26.977 150.792,-24.638 143.51,-24.638 139.851,-20.979 137.033,-20.979 137.033,-24.59 141.447,-29.004 141.447,-54.356 138.287,-57.516 138.287,-60.436 139.065,-61.214 140.589,-61.214 141.447,-60.356 141.447,-59.173 143.724,-56.896 153.131,-56.896 153.512,-56.515 153.512,-54.229 152.623,-53.34 151.099,-53.34 148.305,-50.546
  pour cut-out: 136.525,-21.844
  text "TOP" at 6.604,-74.549 h1.4
Bottom Layer, Bottom:
  pour cut-out: 137.033,-22.225 137.047,-22.225 138.19,-20.979 139.961,-20.979 143.62,-24.638 150.792,-24.638 153.131,-26.977 153.131,-29.21 152.115,-30.226 149.575,-30.226 148.305,-31.496 148.305,-50.546 151.099,-53.34 152.623,-53.34 153.512,-54.229 153.512,-56.515 153.131,-56.896 143.724,-56.896 141.447,-59.173 141.447,-60.356 140.589,-61.214 139.065,-61.214 138.287,-60.436 138.287,-57.516 141.351,-54.452 141.351,-28.908 137.033,-24.59
  pour cut-out: 114.532,-22.225 115.675,-21.082 117.051,-21.082 120.71,-24.741 128.627,-24.741 131.198,-27.312 131.198,-29.203 130.072,-30.329 127.074,-30.329 125.804,-31.599 125.804,-50.649 128.598,-53.443 130.122,-53.443 131.011,-54.332 131.011,-56.618 130.63,-56.999 121.223,-56.999 118.438,-59.784 118.438,-60.682 117.676,-61.444 115.898,-61.444 115.136,-60.682 115.136,-58.269 118.946,-54.459 118.946,-29.107 114.532,-24.693
  pour cut-out: 92.106,-22.225 93.376,-20.955 93.408,-20.979 94.893,-20.979 98.552,-24.638 105.865,-24.638 108.204,-26.977 108.204,-29.21 107.188,-30.226 104.648,-30.226 103.378,-31.496 103.378,-50.546 106.172,-53.34 107.696,-53.34 108.585,-54.229 108.585,-56.515 108.204,-56.896 98.797,-56.896 96.012,-59.681 96.012,-60.579 95.25,-61.341 93.472,-61.341 92.71,-60.579 92.71,-58.166 96.52,-54.356 96.52,-29.004 92.106,-24.59
  pour cut-out: 70.231,-21.844 70.255,-21.844 71.12,-20.979 73.303,-20.979 76.962,-24.638 83.99,-24.638 86.329,-26.977 86.329,-29.21 85.313,-30.226 82.773,-30.226 81.503,-31.496 81.503,-50.546 84.297,-53.34 85.821,-53.34 86.71,-54.229 86.71,-56.515 86.329,-56.896 76.922,-56.896 74.137,-59.681 74.137,-60.579 73.375,-61.341 71.597,-61.341 70.835,-60.579 70.835,-58.166 74.645,-54.356 74.645,-29.004 70.231,-24.59
  text "BOT" at 6.731,-74.549 h1.4

## Silkscreen, mask and mechanical layers (free items; w line width, h text height)
Top Overlay, Top Silk:
  text "TX_LPF_addon" at 12.7,-73.025 h1.4
  text "T.Angelov 15.12.2020" at 12.7,-75.438 h1.4